# EAGLE board VDF_board2025 (EAGLE 6.1)
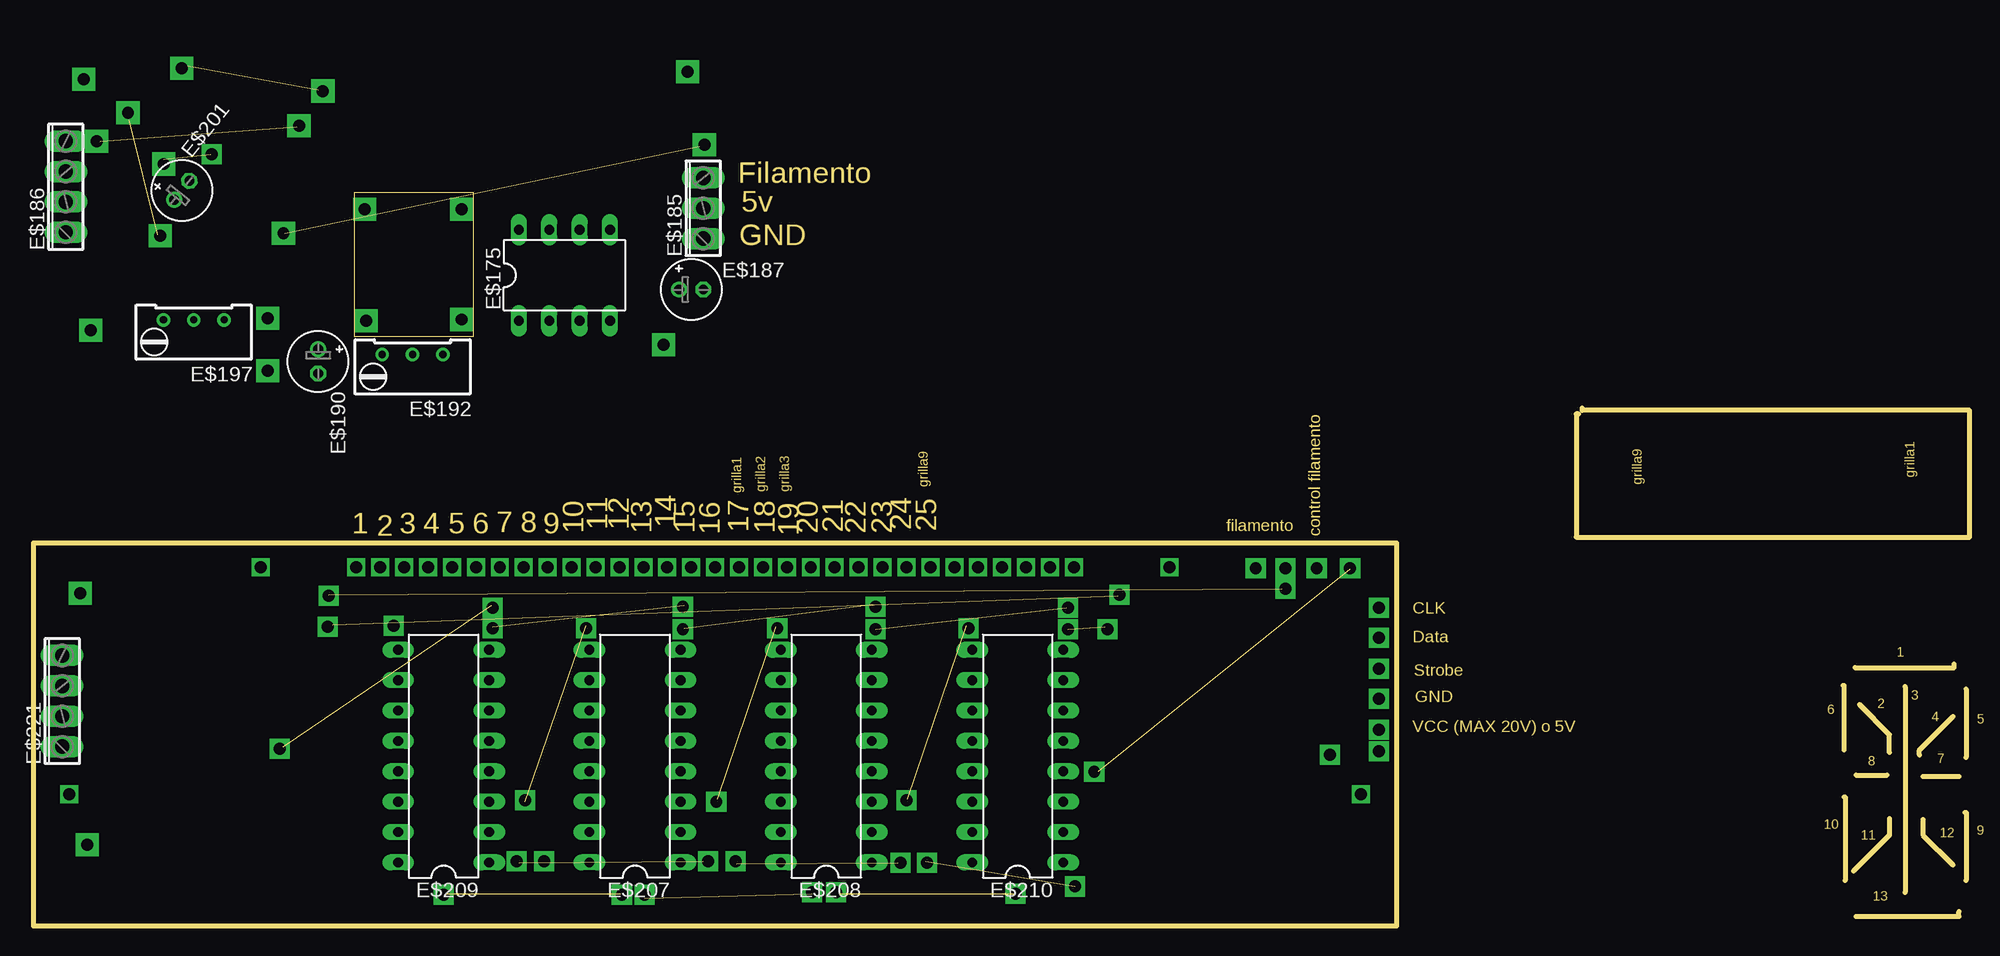
[diagram p0: board, top side]
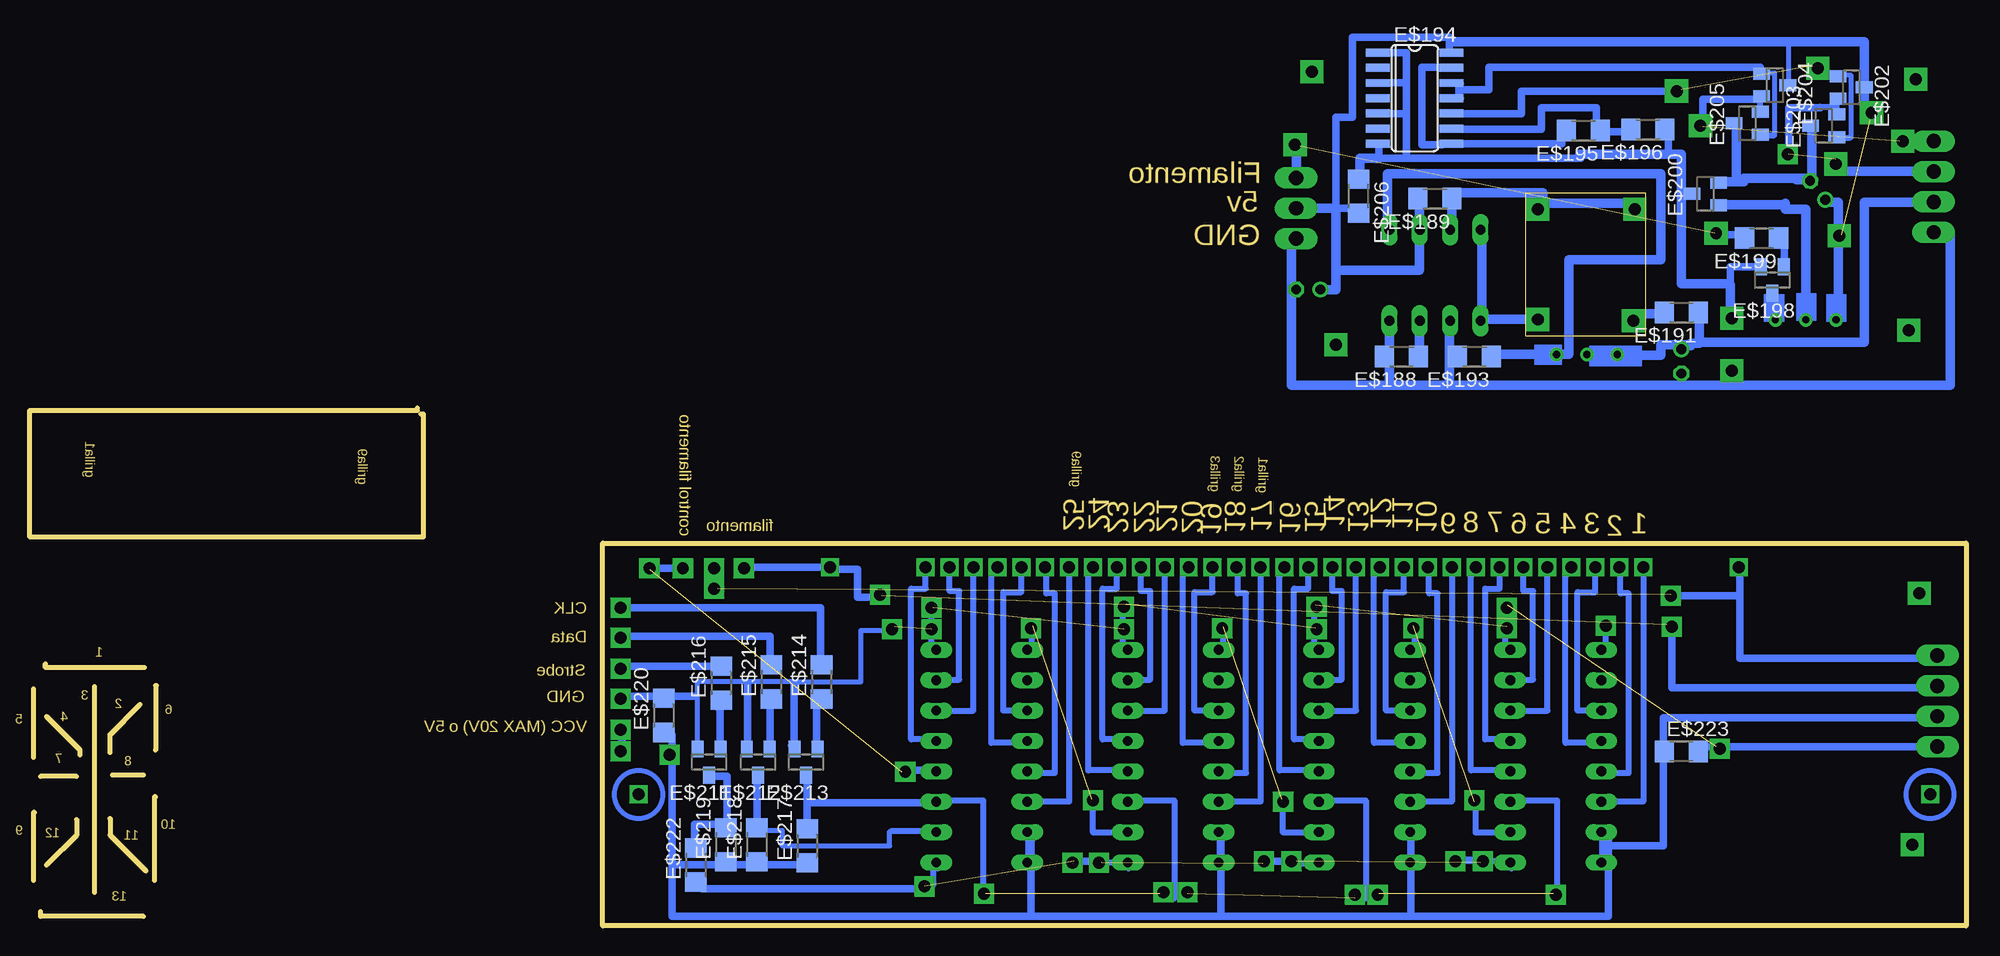
[diagram p1: board, bottom side, seen from below]

Size 161.9 x 71.9 mm. Coordinates in mm from the lower left corner, seen from the top.
Outline: 21,57.9 55.7,65.2
Outline: 10.9,64.1 14.8,64.5
Outline: 10.4,57.8 8,67.4
Outline: 12.9,71.9 23.8,69.9
Outline: 5.6,65.6 22,66.8
Outline: 24.7,27.7 104.4,28.2
Outline: 110.1,29.8 89,12.9
Outline: 41.1,10.4 46.2,25.1
Outline: 57.2,10.6 62.1,25
Outline: 73.1,10.6 78,25.1
Outline: 86.5,24.8 89.6,25
Outline: 34.5,2.7 49.1,2.7
Outline: 51.1,2.3 65.1,2.7
Outline: 67.4,2.7 82,2.7
Outline: 40.6,5.3 56,5.4
Outline: 58.8,5.2 72.3,5.3
Outline: 74.6,5.4 87.1,3.3
Outline: 38.4,25 54.4,26.8
Outline: 54.4,24.9 70.2,26.9
Outline: 70.4,24.8 86.4,26.6
Outline: 25,25.2 90.7,27.6
Outline: 20.9,15 38.3,26.8
Outline: 129.2,42.8 129,42.8 129,32.5 161.9,32.5 161.9,43.1 129.5,43.1 129.5,43.3
Outline: 156.5,20 156.5,2.8
Outline: 152.3,21.6 160.6,21.6 160.6,21.9
Outline: 152.4,0.8 161,0.8 161,1.2
Outline: 161.6,19.8 161.6,14.1
Outline: 161.5,9.5 161.6,9.5 161.6,3.8
Outline: 151.3,20.1 151.4,20.1 151.4,14.7
Outline: 151.4,10.8 151.5,10.8 151.5,3.8
Outline: 152.4,12.6 155,12.6
Outline: 158,12.5 161,12.5
Outline: 157.7,14.3 157.7,14.7 160.5,17.5
Outline: 155.2,14.5 155.2,16 152.7,18.5
Outline: 155.2,9 155.2,7.6 152.2,4.6
Outline: 158,8.9 158,7.6 160.5,5.1
Outline: 26.8,61.3 26.8,49.3 36.8,49.3 36.8,61.3 26.8,61.3
Outline: 0,0 114,0 114,32 0,32 0,0
Copper layers (1*16): Top 0.035mm / dielectric 1.5mm / Bottom 0.035mm
Design rules: minimum track width 10mil, minimum drill 24mil, track to track 8mil, track to pad 8mil, pad to pad 8mil, via to via 8mil, smd to smd 8mil, copper to edge 40mil, drill to drill 8mil, minimum pad ring 10mil, minimum via ring 8mil, stop-mask expansion 4mil, vias tented up to drill 0mil, thermal gap 10mil

## Footprints (pad centres in the part's own frame; a part is rotated, then mirrored left to right if it is on the bottom)
DIL08 = drill 0.813 long: 1 -3.81,-3.81; 2 -1.27,-3.81; 3 1.27,-3.81; 4 3.81,-3.81; 5 3.81,3.81; 6 1.27,3.81; 7 -1.27,3.81; 8 -3.81,3.81
3POL254 = drill 1.2 long: 1 -2.54,0; 2 0,0; 3 2.54,0
4POL254 = drill 1.2 long: 1 -3.81,0; 2 -1.27,0; 3 1.27,0; 4 3.81,0
E2-5 = drill 0.813 pad 1.27: + -1.016,0 | drill 0.813 pad 1.27 octagon: - 1.016,0
R1206 = smd 1.6 x 1.803: 1 -1.422,0; 2 1.422,0
RTRIM64W = drill 0.61: 1 1.27,-2.54; 2 1.27,0; 3 1.27,2.54
SO14 = smd 0.66 x 2.032: 1 -3.81,-3.073; 2 -2.54,-3.073; 3 -1.27,-3.073; 4 0,-3.073; 5 1.27,-3.073; 6 2.54,-3.073; 7 3.81,-3.073; 8 3.81,3.073; 9 2.54,3.073; 10 1.27,3.073; 11 0,3.073; 12 -1.27,3.073; 13 -2.54,3.073; 14 -3.81,3.073
SOT23 = smd 1 x 1.4: 1 -0.95,-1.1; 2 0.95,-1.1; 3 0,1.1
DIL16 = drill 0.813 long: 1 -8.89,-3.81; 2 -6.35,-3.81; 3 -3.81,-3.81; 4 -1.27,-3.81; 5 1.27,-3.81; 6 3.81,-3.81; 7 6.35,-3.81; 8 8.89,-3.81; 9 8.89,3.81; 10 6.35,3.81; 11 3.81,3.81; 12 1.27,3.81; 13 -1.27,3.81; 14 -3.81,3.81; 15 -6.35,3.81; 16 -8.89,3.81

## Placement (x,y rotation side)
E$175  [DIL08]  44.4,54.4 0 top
E$185  [3POL254]  56,60 90 top
E$186  [4POL254]  2.7,61.8 90 top
E$187  [E2-5]  55,53.2 0 top
E$188  [R1206]  47.2,47.6 180 bottom
E$189  [R1206]  44.4,60.8 180 bottom
E$190  [E2-5]  23.8,47.2 270 top
E$191  [R1206]  23.8,51.3 180 bottom
E$192  [RTRIM64W]  31.7,46.5 90 top
E$193  [R1206]  41.1,47.6 180 bottom
E$194  [SO14]  46.1,69.2 270 bottom
E$195  [R1206]  32,66.5 180 bottom
E$196  [R1206]  26.6,66.6 180 bottom
E$197  [RTRIM64W]  13.4,49.4 90 top
E$198  [SOT23]  16.2,54 180 bottom
E$199  [R1206]  17.1,57.5 180 bottom
E$200  [SOT23]  21.8,61.2 90 bottom
E$201  [E2-5]  12.4,61.5 51.4 top
E$202  [SOT23]  9.6,70.1 270 bottom
E$203  [SOT23]  11.9,66.9 90 bottom
E$204  [SOT23]  16,70.3 270 bottom
E$205  [SOT23]  18.3,67.1 90 bottom
E$206  [R1206]  50.8,61 270 bottom
E$207  [DIL16]  50.3,14.2 90 top
E$208  [DIL16]  66.3,14.2 90 top
E$209  [DIL16]  34.3,14.2 90 top
E$210  [DIL16]  82.3,14.2 90 top
E$211  [SOT23]  105.1,13.7 180 bottom
E$212  [SOT23]  101,13.7 180 bottom
E$213  [SOT23]  97,13.7 180 bottom
E$214  [R1206]  95.7,20.4 90 bottom
E$215  [R1206]  99.9,20.4 90 bottom
E$216  [R1206]  104.1,20.3 90 bottom
E$217  [R1206]  96.9,6.7 90 bottom
E$218  [R1206]  101.1,6.8 90 bottom
E$219  [R1206]  103.7,6.8 90 bottom
E$220  [R1206]  108.9,17.6 90 bottom
E$221  [4POL254]  2.4,18.8 90 top
E$222  [R1206]  106.2,5.1 90 bottom
E$223  [R1206]  23.8,14.6 0 bottom

## Library data of the parts
E$175 E$194 E$207-E$210 = 40xx
E$185 E$186 E$221 = con-phoenix-254
E$187-E$193 E$195-E$197 E$199 E$201 E$206 E$214-E$220 E$222 E$223 = rcl
E$198 E$200 E$202-E$205 E$211-E$213 = transistor

## Tracks (layer width: path | path; a pad name or v marks a point on that pad's centre or on a via)
S$863  (via drill 1 pad 1.93)
  other vias: 27.7,59.9
S$864  (via drill 1 pad 1.93)
  other vias: 27.8,50.6
S$865  (via drill 1 pad 1.93)
  other vias: 35.8,59.9
S$866  (via drill 1 pad 1.93)
  other vias: 35.8,50.7
S$867
  Bottom 0.813: 55.2,57.2 56.4,57.2 56.4,45.2 1.3,45.2 1.3,57.7
S$868
  Bottom 0.813: 55.5,60 52.7,60 52.7,53.2 53.7,53.2
S$869
  Bottom 0.813: 45.7,57.3 45.8,57.3
S$870
  Bottom 0.813: 48.2,49.8 48.2,45.4
S$871
  Bottom 0.813: 43.2,49.7 43.2,45.7
S$872
  Bottom 0.813: 45.9,47.6 45.7,47.6 45.7,49.7
S$873
  Bottom 0.813: 45.7,58.8 45.7,60.4
S$874
  Bottom 0.813: 43.1,58.8 43,58.8 43,60.6
S$875
  Bottom 0.813: 40.5,58.7 40.5,51.2
S$876
  Bottom 0.813: 42.4,61.3 35.4,61.3 35.4,60.4 28.5,60.4 28.5,60.5
S$877
  Bottom 0.813: 36.1,50.7 40.2,50.7
S$878
  Bottom 0.813: 25.6,51.2 27.4,51.2 27.4,50.6
S$879
  Bottom 0.813: 22.4,50.6 22.3,50.6 22.3,48.7 23,48.7 23,48.5
S$880
  Bottom 0.813: 52.3,54.8 45.7,54.8 45.7,58
S$881
  Bottom 0.813: 31.7,47.7 25.5,47.7 25.5,48.6 23.1,48.6
S$882
  Bottom 0.813: 39.3,47.8 34.3,47.8
S$883
  Bottom 0.813: 34.1,47.8 33.2,47.8 33.2,55.7 25.5,55.7 25.5,62.9 48.4,62.9 48.4,58.8
S$884
  Bottom 0.813: 22.4,48.8 8.5,48.8 8.5,60.5 3.2,60.5 3.2,60.2
S$885  (via drill 1 pad 1.93)
  other vias: 19.6,46.4
S$886  (via drill 1 pad 1.93)
  other vias: 19.6,50.8 20.9,57.9
S$887
  Bottom 0.61: 17.2,55.1 19.7,55.1 19.7,53.6
  Bottom 0.813: 19.7,51 19.7,53.6 19.8,53.7 23.8,53.7 23.8,64.5 32.3,64.5
S$888
  Bottom 0.61: 32.2,64.2 49.1,64.2 49.1,65.3
  Bottom 0.813: 49.1,64.2 50.7,64.2 50.7,62.9
S$889
  Bottom 0.61: 43.2,73.1 43.2,74.3 51.3,74.3 51.3,67.6 52.7,67.6 52.7,60 51.5,60
S$890  (via drill 1 pad 1.93)
  other vias: 56.1,65.3
S$891
  Bottom 0.61: 35.6,66.6 42.6,66.6
S$892
  Bottom 0.61: 42.4,65.4 33.8,65.4 33.8,66.1
S$893
  Bottom 0.61: 43.8,65.3 45.5,65.3 45.5,71.8 43.9,71.8 43.9,71.7
S$894
  Bottom 0.61: 42.2,69.9 39.9,69.9 39.9,71.8 17.2,71.8 17.2,71.3
S$895
  Bottom 0.61: 42.3,69.2 42.4,69.2 42.4,70.4 42.3,70.4
S$896  (via drill 1 pad 1.93)
  other vias: 22.2,66.9
S$897
  Bottom 0.813: 13.5,59.9 15.1,59.9 15.1,60.4
S$898
  Bottom 0.61: 24.9,64.6 24.9,66
S$899
  Bottom 0.61: 16.1,50.8 16,50.8 16,52.8
S$900
  Bottom 0.61: 20.4,57.8 19.1,57.8
S$901
  Bottom 0.61: 15.5,57.4 15.2,57.4 15.2,55.3
S$902  (via drill 1 pad 1.93)
  other vias: 10.6,57.7
S$903
  Bottom 0.813: 10.7,53.2 10.7,50.8
S$904
  Bottom 0.813: 13.4,59.9 13.4,50.6
S$905
  Bottom 0.813: 20.3,60.3 15.2,60.3
S$907
  Bottom 0.5: 10.8,67.9 10.8,69
S$908
  Bottom 0.813: 12.9,66.8 12.9,62.5 18.6,62.5 18.6,62.2 20.4,62.2
S$909
  Bottom 0.406: 9.7,65.9 9.6,65.9 9.6,71.1 10.2,71.1
  Bottom 0.5: 10.5,66 10.5,65.9 9.7,65.9
S$910
  Bottom 0.5: 17.2,68.1 17.2,69.2
S$911
  Bottom 0.61: 12.2,68.4 14.8,68.4 14.8,64.8
S$912
  Bottom 0.406: 16.1,66.1 16,66.1 16,71.3 16.6,71.3
  Bottom 0.5: 16.9,66.2 16.9,66.1 16.1,66.1
S$913  (via drill 1 pad 1.68)
  other vias: 14.9,64.5
S$914  (via drill 1 pad 1.93)
  other vias: 24.2,69.8
S$915
  Bottom 0.61: 17.5,69.1 22,69.1 22,67.5
S$916
  Bottom 0.5: 12.2,68.5 11,68.5
S$917
  Bottom 0.406: 14.8,70.4 14.8,73.6
S$918
  Bottom 0.406: 8.3,70.3 8.3,72.5
S$919
  Bottom 0.813: 42.9,73.9 8.5,73.9 8.5,67.6
S$920  (via drill 1 pad 1.93)
  other vias: 5.3,65.6
S$921
  Bottom 0.61: 37.2,69.6 37.2,67.9 42.4,67.9
S$922
  Bottom 0.813: 19.2,66.8 19.2,62.4
S$923  (via drill 1 pad 1.93)
  other vias: 10.9,63.7
S$924
  Bottom 0.813: 56,62.8 56,65.1
S$925
  Bottom 0.813: 3.9,63.1 10.5,63.1 10.5,63.7
S$926  (via drill 1 pad 1.93)
  other vias: 7.9,68
S$927
  Bottom 0.813: 10.7,53.3 10.7,60.5 11.6,60.5
S$928
  Bottom 0.61: 48.6,73 46.8,73 46.8,64.6
S$929
  Bottom 0.61: 48.2,70.5 46.9,70.5
S$930
  Bottom 0.61: 48.3,67.9 46.9,67.9
S$931
  Bottom 0.61: 28.1,66.4 30.9,66.4 30.9,68.4 35.5,68.4 35.5,66.6
S$932  (via drill 1 pad 1.93)
  other vias: 12.4,71.7
S$933
  Bottom 0.61: 37.2,69.8 24.8,69.8 24.8,69.9
S$934  (via drill 1 pad 1.93)
  other vias: 4.8,49.8
S$935  (via drill 1 pad 1.93)
  other vias: 4.2,70.8
S$936  (via drill 1 pad 1.93)
  other vias: 54.7,71.4
S$937  (via drill 1 pad 1.93)
  other vias: 52.7,48.6
S$938
  Bottom 0.813: 13.1,62.4 14.2,62.4 14.2,62.5
S$939  (via drill 1 pad 1.42)
  other vias: 27,30
S$940  (via drill 1 pad 1.42)
  other vias: 29,30
S$941  (via drill 1 pad 1.42)
  other vias: 31,30
S$942  (via drill 1 pad 1.42)
  other vias: 33,30
S$943  (via drill 1 pad 1.42)
  other vias: 35,30
S$944  (via drill 1 pad 1.42)
  other vias: 37,30
S$945  (via drill 1 pad 1.42)
  other vias: 39,30
S$946  (via drill 1 pad 1.42)
  other vias: 41,30
S$947  (via drill 1 pad 1.42)
  other vias: 43,30
S$948  (via drill 1 pad 1.42)
  other vias: 45,30
S$949  (via drill 1 pad 1.42)
  other vias: 47,30
S$950  (via drill 1 pad 1.42)
  other vias: 49,30
S$951  (via drill 1 pad 1.42)
  other vias: 51,30
S$952  (via drill 1 pad 1.42)
  other vias: 53,30
S$953  (via drill 1 pad 1.42)
  other vias: 55,30
S$954  (via drill 1 pad 1.42)
  other vias: 57,30
S$955  (via drill 1 pad 1.42)
  other vias: 59,30
S$956  (via drill 1 pad 1.42)
  other vias: 61,30
S$957  (via drill 1 pad 1.42)
  other vias: 63,30
S$958  (via drill 1 pad 1.42)
  other vias: 65,30
S$959  (via drill 1 pad 1.42)
  other vias: 67,30
S$960  (via drill 1 pad 1.42)
  other vias: 69,30
S$961  (via drill 1 pad 1.42)
  other vias: 71,30
S$962  (via drill 1 pad 1.42)
  other vias: 73,30
S$963  (via drill 1 pad 1.42)
  other vias: 75,30
S$964  (via drill 1 pad 1.42)
  other vias: 77,30
S$965  (via drill 1 pad 1.42)
  other vias: 79,30
S$966  (via drill 1 pad 1.42)
  other vias: 81,30
S$967  (via drill 1 pad 1.42)
  other vias: 83,30
S$968  (via drill 1 pad 1.42)
  other vias: 85,30
S$969  (via drill 1 pad 1.42)
  other vias: 87,30
S$970  (via drill 1 pad 1.42)
  other vias: 95,30
S$971  (via drill 1 pad 1.42)
  other vias: 19,30
S$972  (via drill 1 pad 1.42)
  other vias: 3,11
S$973  (via drill 1 pad 1.42)
  other vias: 111,11
S$974
  Bottom 0.5: 43,29.4 43,10.4 47.4,10.4
S$975
  Bottom 0.5: 54.6,18 51,18 51,29.5
S$976
  Bottom 0.5: 46.5,12.8 44.2,12.8 44.2,27.8 44.9,27.8 44.9,29.3
S$977
  Bottom 0.5: 46.9,18 48.5,18 48.5,27.9 47,27.9 47,29.3
S$978
  Bottom 0.5: 47.1,15.3 49.5,15.3 49.5,29.2
S$979
  Bottom 0.5: 53.5,20.6 52.2,20.6 52.2,28 53,28 53,29.4
S$980
  Bottom 0.5: 55,15.6 56.2,15.6 56.2,28.2 55,28.2 55,29.3
S$981
  Bottom 0.5: 55.1,13 57.4,13 57.4,29.2
S$982  (via drill 1 pad 1.68)
  other vias: 54.3,26.7
S$983  (via drill 1 pad 1.68)
  other vias: 46.2,24.9
S$984
  Bottom 0.5: 46.4,23.1 46.1,23.1 46.1,24.5
S$985
  Bottom 0.5: 54.7,23.3 54.5,23.3 54.5,25.9
S$986
  Bottom 0.5: 46.6,5.3 46.4,5.3 46.4,7.4 46.4,7.8
  Bottom 0.61: 46.4,7.4 46.4,1
S$987
  Bottom 0.61: 105.7,3.1 86.9,3.1 86.9,3.2
S$988  (via drill 1 pad 1.68)
  other vias: 51.1,2.6
S$989  (via drill 1 pad 1.68)
  other vias: 56.4,5.4
S$990
  Bottom 0.5: 46,7.8 46,7.9
S$991
  Bottom 0.5: 54,10.5 50.2,10.5 50.2,2.3
S$992
  Bottom 0.5: 53.9,5.2 54.1,5.2 56.3,5.2
S$993
  Bottom 0.5: 54.7,7.8 57.1,7.8 57.1,10.1
S$994
  Bottom 0.5: 59,29.4 59,10.4 63.4,10.4
S$995
  Bottom 0.5: 70.6,18 67,18 67,29.5
S$996
  Bottom 0.5: 62.5,12.8 60.2,12.8 60.2,27.8 60.9,27.8 60.9,29.3
S$997
  Bottom 0.5: 62.9,18 64.5,18 64.5,27.9 63,27.9 63,29.3
S$998
  Bottom 0.5: 63.1,15.3 65.5,15.3 65.5,29.2
S$999
  Bottom 0.5: 69.5,20.6 68.2,20.6 68.2,28 69,28 69,29.4
S$1000
  Bottom 0.5: 71,15.6 72.2,15.6 72.2,28.2 71,28.2 71,29.3
S$1001
  Bottom 0.5: 71.1,13 73.4,13 73.4,29.2
S$1002  (via drill 1 pad 1.68)
  other vias: 70.4,26.7
S$1003  (via drill 1 pad 1.68)
  other vias: 62.2,24.9
S$1004
  Bottom 0.5: 62.4,23.1 62.1,23.1 62.1,24.5
S$1005
  Bottom 0.5: 70.7,23.3 70.5,23.3 70.5,26.4
S$1006
  Bottom 0.5: 62.6,5.3 62.4,5.3 62.4,7.5 62.4,7.8
  Bottom 0.61: 62.4,7.5 62.3,7.5 62.3,0.8
S$1007
  Bottom 0.61: 74.3,5.4 73.1,5.4 73.1,5.3
S$1008  (via drill 1 pad 1.68)
  other vias: 67.1,2.8
S$1009  (via drill 1 pad 1.68)
  other vias: 72.5,5.3
S$1010
  Bottom 0.5: 62,7.8 62,7.9
S$1011
  Bottom 0.5: 70,10.5 66.2,10.5 66.2,2.3
S$1012
  Bottom 0.5: 70,4.8 70.2,5.3 72.4,5.3
S$1013
  Bottom 0.5: 70.7,7.8 73,7.8 73,10.1
S$1014
  Bottom 0.5: 27,29.4 27,10.4 31.4,10.4
S$1015
  Bottom 0.5: 38.6,18 35,18 35,29.5
S$1016
  Bottom 0.5: 30.5,12.8 28.2,12.8 28.2,27.8 28.9,27.8 28.9,29.3
S$1017
  Bottom 0.5: 30.9,18 32.5,18 32.5,27.9 31,27.9 31,29.3
S$1018
  Bottom 0.5: 31.1,15.3 33.5,15.3 33.5,29.2
S$1019
  Bottom 0.5: 37.5,20.6 36.2,20.6 36.2,28 37,28 37,29.4
S$1020
  Bottom 0.5: 39,15.6 40.2,15.6 40.2,28.2 39,28.2 39,29.3
S$1021
  Bottom 0.5: 39.1,13 41.4,13 41.4,29.2
S$1022  (via drill 1 pad 1.68)
  other vias: 38.4,24.9
S$1023  (via drill 1 pad 1.68)
  other vias: 30.1,25.1
S$1024
  Bottom 0.5: 30.4,23.1 30.1,23.1 30.1,25.7
S$1025
  Bottom 0.5: 38.7,23.3 38.5,23.3 38.5,25.7
S$1026
  Bottom 0.5: 30.6,5.3 30.4,5.3 30.4,7.8
S$1027
  Bottom 0.61: 86.6,3.2 86.6,3.1
S$1028  (via drill 1 pad 1.68)
  other vias: 34.3,2.6
S$1029  (via drill 1 pad 1.68)
  other vias: 40.4,5.4
S$1030
  Bottom 0.5: 30,7.8 30,7.9
S$1031
  Bottom 0.5: 38,10.5 34.2,10.5 34.2,2.3
S$1032
  Bottom 0.5: 38,4.8 38.4,5.4 40.2,5.4
S$1033
  Bottom 0.5: 38.7,7.8 41,7.8 41,9.9
S$1034
  Bottom 0.5: 75,29.4 75,10.4 79.4,10.4
S$1035
  Bottom 0.5: 86.6,18 83,18 83,29.5
S$1036
  Bottom 0.5: 78.5,12.8 76.2,12.8 76.2,27.8 76.9,27.8 76.9,29.3
S$1037
  Bottom 0.5: 78.9,18 80.5,18 80.5,27.9 79,27.9 79,29.3
S$1038
  Bottom 0.5: 79.1,15.3 81.5,15.3 81.5,29.2
S$1039
  Bottom 0.5: 85.5,20.6 84.2,20.6 84.2,28 85,28 85,29.4
S$1040
  Bottom 0.5: 87,15.6 88.2,15.6 88.2,28.2 87,28.2 87,29.3
S$1041  (via drill 1 pad 1.68)
  other vias: 86.5,26.6
S$1042  (via drill 1 pad 1.68)
  other vias: 78.2,24.9
S$1043
  Bottom 0.5: 78.4,23.1 78.1,23.1 78.1,24.5
S$1044  (via drill 1 pad 1.68)
  Bottom 0.5: 86.7,23.3 86.5,23.3 v86.5,24.8 86.5,26.1
S$1045
  Bottom 0.5: 78.6,5.3 78.4,5.3 78.4,7.8
S$1046  (via drill 1 pad 1.68)
  other vias: 74.7,5.3
S$1047  (via drill 1 pad 1.68)
  other vias: 82.1,2.7
S$1048  (via drill 1 pad 1.68)
  other vias: 87.1,3.3
S$1049
  Bottom 0.5: 78,7.8 78,7.9
S$1050
  Bottom 0.5: 86,10.5 82.2,10.5 82.2,2.8 82.2,2.6 82.2,2.3
S$1051
  Bottom 0.5: 86,4.8 86.4,5.2 86.4,3.4
S$1052  (via drill 1 pad 1.68)
  other vias: 58.7,5.4
S$1053
  Bottom 0.61: 78.5,7.7 78.2,7.7 78.2,0.8
S$1054  (via drill 1 pad 1.68)
  other vias: 42.7,5.4
S$1055
  Bottom 0.61: 58.2,5.4 56.6,5.4 56.6,5.3
S$1056
  Bottom 0.61: 30,7.3 29.9,7.3 29.9,0.8 108.2,0.8 108.2,5.1 | 96.6,5.1 108.2,5.1 | 108.2,5.1 108.2,5.5
S$1057  (via drill 1 pad 1.68)
  other vias: 112.5,26.6
S$1058  (via drill 1 pad 1.68)
  other vias: 112.5,24.1
S$1059  (via drill 1 pad 1.68)
  other vias: 112.5,21.5
S$1060  (via drill 1 pad 1.68)
  other vias: 112.5,19
S$1061  (via drill 1 pad 1.68)
  other vias: 112.5,16.4
S$1062  (via drill 1 pad 1.68)
  other vias: 41.1,10.5
S$1063  (via drill 1 pad 1.68)
  other vias: 57.1,10.4
S$1064  (via drill 1 pad 1.68)
  other vias: 73,10.5
S$1065  (via drill 1 pad 1.68)
  other vias: 88.7,12.9
S$1066
  Bottom 0.61: 42.1,5.5 40.8,5.5 40.8,5.4
S$1067
  Bottom 0.61: 112.9,16.5 112.9,16.8
S$1068
  Bottom 0.61: 108.2,16 108.2,5.6
S$1069
  Bottom 0.61: 3,19.9 24.6,19.9 24.6,24.9
S$1070
  Bottom 0.61: 88.1,13 86.8,13 86.8,12.8
S$1071
  Bottom 0.61: 112,26.6 95.8,26.6 95.8,22.4
S$1072
  Bottom 0.61: 111.9,24.2 100,24.2 100,22.4
S$1073
  Bottom 0.61: 111.8,21.7 104.2,21.7 104.2,21.9
S$1074
  Bottom 0.406: 97.9,15.1 98.1,15.1 98.1,20.4 | 98.1,20.4 106.1,20.4 106.1,15.3 | 98.1,20.4 92.4,20.4 92.4,24.7 90.5,24.7 90.5,24.5
S$1075
  Bottom 0.61: 102,15.2 101.9,15.2 101.9,20.2
S$1076  (via drill 1 pad 1.68)
  other vias: 70.4,24.8
S$1077
  Bottom 0.5: 86.8,7.9 89.9,7.9
S$1078  (via drill 1 pad 1.68)
  other vias: 54.3,24.8
S$1079  (via drill 1 pad 1.68)
  other vias: 89.8,24.8
S$1080
  Bottom 0.813: 2.9,17.5 2.9,17.2
S$1081
  Bottom 0.61: 96.1,15.2 96.1,18.7
S$1082
  Bottom 0.61: 100,15.3 100,18.4
S$1083
  Bottom 0.61: 104.2,15.3 104.2,18.2 104.3,18.2
S$1084
  Bottom 0.61: 98.2,15.1 98,15.1 98,20.2
S$1085
  Bottom 0.61: 111.8,19.2 106.3,19.2
S$1086  (via drill 1 pad 1.68)
  other vias: 24.6,25
S$1087  (via drill 1 pad 1.68)
  other vias: 90.8,27.7
S$1088
  Bottom 0.61: 91.4,27.5 92.7,27.5 92.7,29.8 94.9,29.8 94.9,29.7
S$1089
  Bottom 0.61: 3.5,17.4 25.3,17.4 25.3,6.7 29.8,6.7
S$1090
  Bottom 0.61: 3.7,15 22.7,15 22.7,14.8
S$1091  (via drill 1 pad 1.68)
  other vias: 38.4,26.6
S$1092  (via drill 1 pad 1.68)
  other vias: 20.6,14.8
S$1093  (via drill 1 pad 1.68)
  other vias: 112.5,14.6
S$1094
  Bottom 0.61: 112.7,14.7 112.4,14.7 112.4,16
S$1095  (via drill 1 pad 1.68)
  other vias: 108.4,14.3
S$1099  (via drill 1 pad 1.68)
  other vias: 65.1,2.8
S$1100  (via drill 1 pad 1.68)
  other vias: 49.2,2.6
S$1101
  Bottom 0.406: 49.7,2.4 50.4,2.4
S$1102
  Bottom 0.406: 65.5,2.7 66.3,2.7
S$1103
  Bottom 0.61: 96.9,8.7 96.9,12.3
S$1104
  Bottom 0.61: 101.3,8.5 101.1,8.5 101.1,12.1
S$1105
  Bottom 0.61: 105,12.5 103.6,12.5 103.6,8.7
S$1106
  Bottom 0.61: 87,10.3 96.8,10.3 96.8,10.4
S$1107
  Bottom 0.406: 100.7,8 99,8 99,6.7 90,6.7 90,7.9
S$1109
  Bottom 0.61: 104.1,8.5 106.3,8.5 106.3,7
S$1112  (via drill 1 pad 1.68)
  other vias: 102.2,29.9
S$1113  (via drill 1 pad 1.68)
  other vias: 104.7,29.9
S$1114  (via drill 1 pad 1.68)
  other vias: 107.3,29.9
S$1115
  Bottom 0.61: 95.6,30 101.9,30
S$1116
  Bottom 0.61: 107.9,29.9 109.8,29.9
S$1117  (via drill 1 pad 1.68)
  other vias: 104.7,28.2
S$1118  (via drill 1 pad 1.68)
  other vias: 110.1,29.9
S$1119  (via drill 1 pad 1.68)
  other vias: 24.7,27.6
S$1120
  Bottom 0.61: 24.4,27.6 18.9,27.6 | 18.9,27.6 18.9,28 18.9,29.7 | 3.2,22.4 18.9,22.4 18.9,27.6
S$1121  (via drill 1 pad 1.93)
  other vias: 4.5,6.8
S$1122  (via drill 1 pad 1.93)
  other vias: 3.9,27.8
(copper drawn outside any net)
  shapes: Bottom area x6, Bottom circle x2

## Text on the board
Dimension: HECHO | Filamento | 5v | GND | grilla1 | grilla1 | grilla2 | grilla3 | grilla9 | grilla9 | 11 | 12 | 14 | 24 | 1 | 2 | 3 | 4 | 5 | 6 | 7 | 8 | 9 | 10 | 13 | 15 | 16 | 17 | 18 | 19 | 20 | 21 | 22 | 23 | 25 | filamento | control filamento | CLK | Data | 1 | Strobe | GND | 2 | 3 | 6 | 4 | VCC (MAX 20V) o 5V | 5 | 8 | 7 | 14 | extras | 15 | extras | 10 | 11 | 12 | 9 | 16 | extras | 13